# EAGLE board TransientsNanaPanel (EAGLE 9.6.2)
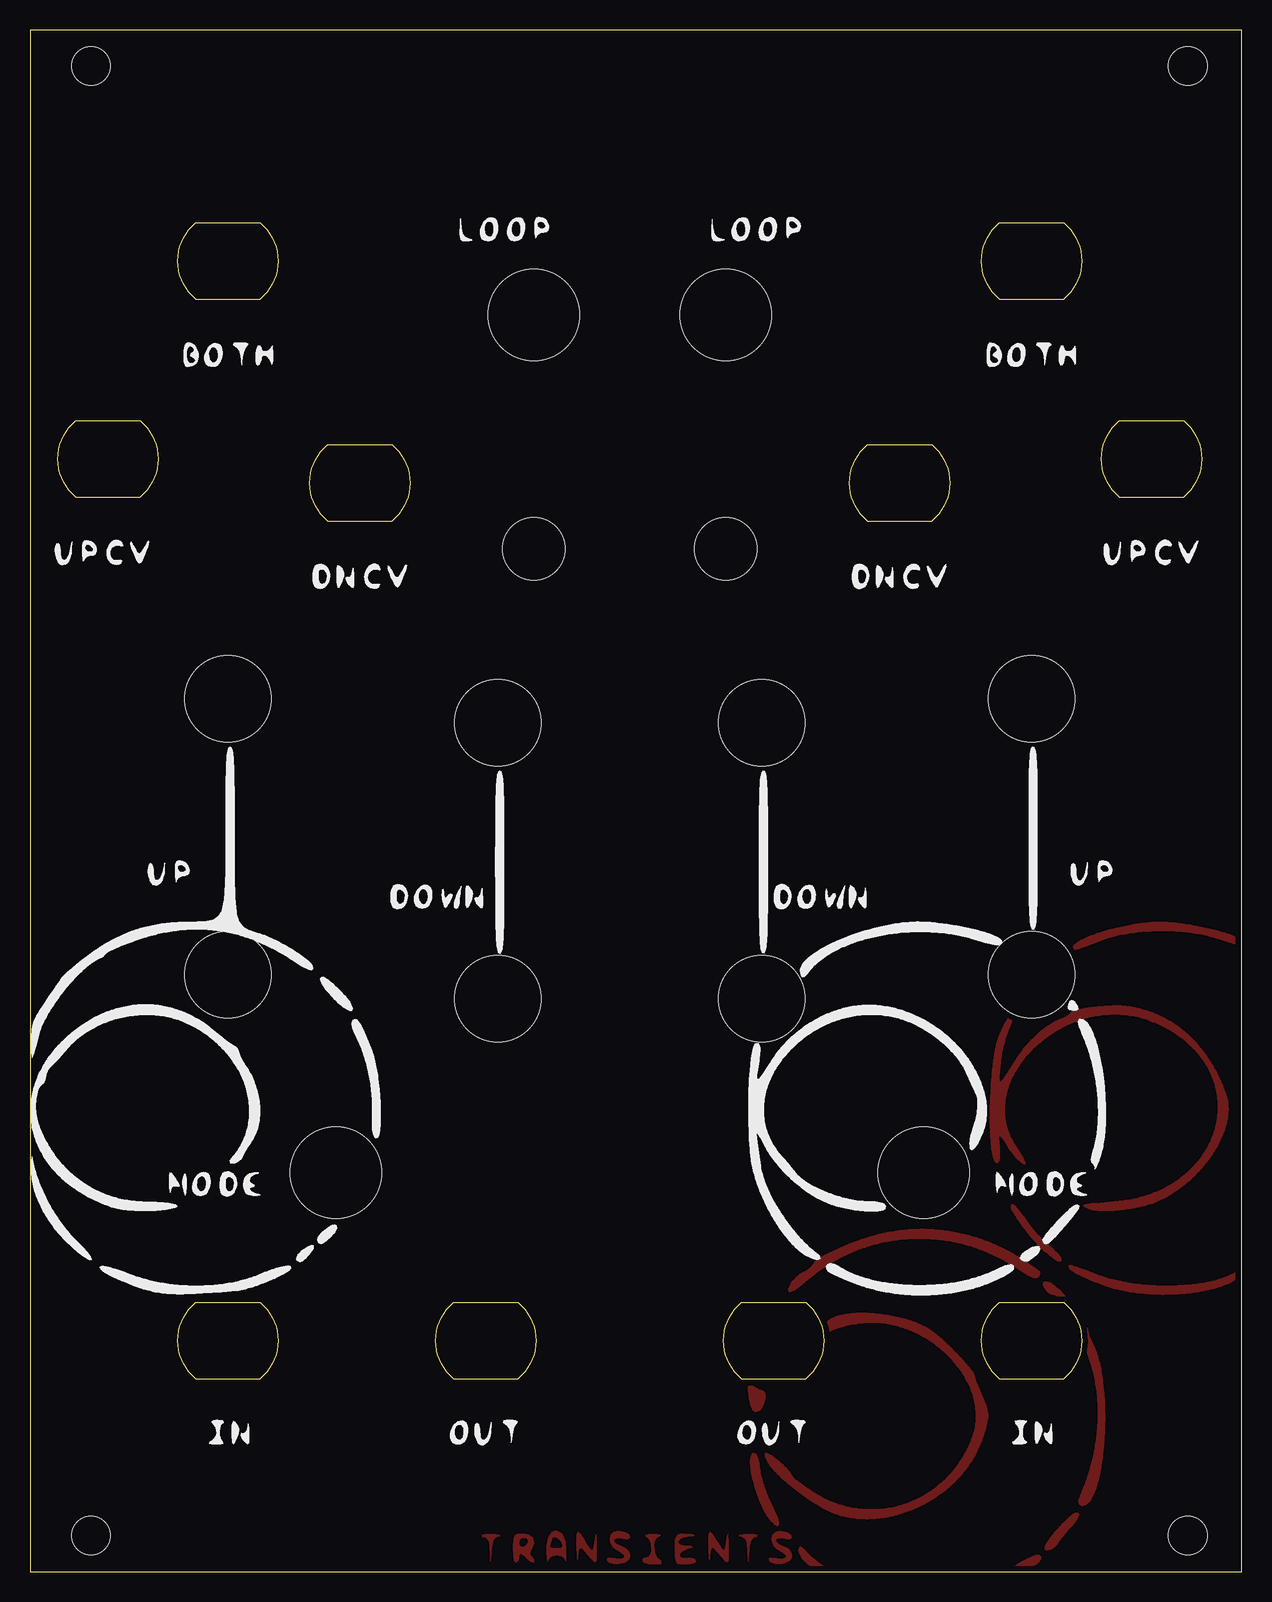
[diagram p0: board, top side]

Size 101 x 128.5 mm. Coordinates in mm from the lower left corner, seen from the top.
Outline: 0,0 101,0 101,128.5 0,128.5 0,0
Copper layers (1*16): Top 0.035mm / dielectric 1.6mm / Bottom 0.035mm
Design rules "Elecrow_2-layer_PCB_eagle_rule": minimum track width 6mil, minimum drill 12mil, track to track 6mil, track to pad 6mil, pad to pad 6mil, via to via 8mil, smd to smd 0mil, copper to edge 20mil, drill to drill 10mil, minimum pad ring 6mil, minimum via ring 6mil, stop-mask expansion 0mil, vias tented up to drill 100mil, thermal gap 10mil
Holes 3.2 mm at 5.08,3 5.08,125.5 96.52,3 96.52,125.5
Holes 5.2 mm at 42,85.25 58,85.25
Holes 7.6 mm at 42,104.75 58,104.75 25.5,33.25 74.5,33.25

## Footprints (pad centres in the part's own frame; a part is rotated, then mirrored left to right if it is on the bottom)
ALPHA9MM_POT_CUTOUT = hole 7.2: 0,0

## Placement (x,y rotation side)
E$1  [CINCH_BANANA_CUTOUT]  16.5,109.25 90 top
E$2  [CINCH_BANANA_CUTOUT]  6.5,92.75 90 top
E$3  [CINCH_BANANA_CUTOUT]  27.5,90.75 90 top
E$4  [CINCH_BANANA_CUTOUT]  83.5,109.25 90 top
E$5  [CINCH_BANANA_CUTOUT]  72.5,90.75 90 top
E$6  [CINCH_BANANA_CUTOUT]  93.5,92.75 90 top
E$7  [CINCH_BANANA_CUTOUT]  16.5,19.25 90 top
E$8  [CINCH_BANANA_CUTOUT]  38,19.25 90 top
E$9  [CINCH_BANANA_CUTOUT]  62,19.25 90 top
E$10  [CINCH_BANANA_CUTOUT]  83.5,19.25 90 top
E$11  [ALPHA9MM_POT_CUTOUT]  16.5,72.75 0 top
E$12  [ALPHA9MM_POT_CUTOUT]  39,70.75 0 top
E$13  [ALPHA9MM_POT_CUTOUT]  61,70.75 0 top
E$14  [ALPHA9MM_POT_CUTOUT]  83.5,72.75 0 top
E$15  [ALPHA9MM_POT_CUTOUT]  16.5,49.75 0 top
E$16  [ALPHA9MM_POT_CUTOUT]  39,47.75 0 top
E$17  [ALPHA9MM_POT_CUTOUT]  61,47.75 0 top
E$18  [ALPHA9MM_POT_CUTOUT]  83.5,49.75 0 top

## Library data of the parts
E$1-E$18 = ElectricNoodleBox

## Tracks (layer width: path | path; a pad name or v marks a point on that pad's centre or on a via)
S$1
  pour Top: 38.34,1.67 38.36,1.07 38.37,0.87 38.41,0.92 38.43,1.12 38.48,1.71 38.49,1.91 38.52,2.11 38.55,2.31 38.6,2.5 38.68,2.69 38.81,2.83 38.99,2.92 39.18,2.97 39.09,3.03 38.89,3.05 38.69,3.05 38.49,3.06 38.29,3.06 38.09,3.05 37.89,3.04 37.7,3.02 37.7,2.95 37.9,2.91 38.07,2.81 38.19,2.66 38.26,2.47 38.29,2.27 38.31,2.07 38.33,1.87 38.34,1.67
S$2
  pour Top: 40.29,1.74 40.29,1.54 40.31,1.34 40.33,1.14 40.36,0.95 40.44,0.77 40.61,0.82 40.72,0.99 40.78,1.18 40.79,1.38 40.89,1.52 41.06,1.43 41.22,1.3 41.52,1.04 41.67,0.91 41.84,0.8 42.03,0.78 42.01,0.97 41.91,1.15 41.76,1.28 41.69,1.46 41.73,1.65 41.82,1.83 41.91,2 41.98,2.19 42.02,2.39 42,2.59 41.92,2.77 41.78,2.91 41.61,3.02 41.42,3.08 41.24,3.11 41.26,2.86 41.43,2.78 41.53,2.61 41.53,2.45 41.45,2.27 41.31,2.12 41.14,2.03 40.94,2.01 40.82,2.16 40.79,2.35 40.81,2.55 40.9,2.73 41.05,2.85 41.24,2.86 41.21,3.12 41.03,3.12 40.83,3.12 40.63,3.1 40.44,3.03 40.35,2.86 40.31,2.66 40.3,2.46 40.29,2.26 40.29,2.06
S$3
  pour Top: 43.07,1.66 43.07,1.46 43.08,1.26 43.1,1.06 43.15,0.87 43.24,1.03 43.36,1.19 43.53,1.3 43.72,1.36 43.92,1.38 44.11,1.36 44.3,1.29 44.47,1.18 44.59,1.02 44.67,0.88 44.7,1.08 44.71,1.28 44.71,1.48 44.7,1.68 44.69,1.88 44.68,2.08 44.66,2.28 44.63,2.48 44.58,2.67 44.52,2.86 44.42,3.04 44.28,3.18 44.11,3.28 43.92,3.34 43.72,3.33 43.54,3.25 43.39,3.12 43.28,2.95 43.21,2.77 43.15,2.58 43.11,2.38 43.08,2.19 43.35,2.17 43.41,2.34 43.48,2.53 43.53,2.73 43.6,2.9 43.8,2.9 43.98,2.82 44.14,2.7 44.27,2.55 44.39,2.18 44.35,1.99 44.18,1.9 43.98,1.88 43.78,1.88 43.58,1.9 43.4,1.97 43.35,2.14 43.08,2.17 43.07,1.98 43.06,1.78
S$4
  pour Top: 45.58,1.84 45.59,1.44 45.61,1.24 45.63,1.04 45.69,1.19 45.75,1.59 45.78,1.79 45.83,1.98 46,1.98 46.14,1.85 46.28,1.7 46.79,1.08 46.93,0.93 47.08,0.8 47.22,0.88 47.24,1.08 47.25,1.28 47.25,1.48 47.24,2.08 47.22,2.68 47.21,2.88 47.19,3.08 47.13,2.93 47.1,2.74 47,2.14 46.96,1.95 46.89,1.76 46.73,1.83 46.61,1.99 46.5,2.16 46.18,2.67 46.07,2.84 45.96,3 45.84,3.16 45.69,3.29 45.59,3.14 45.57,2.94 45.56,2.74 45.56,2.54 45.56,2.34 45.57,1.94
S$5
  pour Top: 48.22,0.82 48.4,0.74 48.6,0.69 48.8,0.67 49,0.67 49.2,0.69 49.39,0.73 49.58,0.79 49.76,0.88 49.91,1.01 50.01,1.19 50.03,1.38 49.97,1.57 49.86,1.74 49.71,1.87 49.54,1.98 49.36,2.06 49.17,2.13 48.99,2.22 48.83,2.33 48.7,2.48 48.68,2.67 48.84,2.79 49.03,2.82 49.23,2.81 49.43,2.77 49.63,2.73 49.83,2.73 50,2.82 49.98,3 49.83,3.13 49.65,3.22 49.46,3.28 49.26,3.33 49.06,3.34 48.87,3.32 48.68,3.25 48.52,3.14 48.4,2.98 48.34,2.79 48.34,2.59 48.4,2.39 48.49,2.22 48.62,2.06 48.76,1.93 48.93,1.81 49.1,1.72 49.27,1.61 49.44,1.49 49.56,1.34 49.57,1.16 49.4,1.06 49.2,1.03 49,1.03 48.8,1.05 48.41,1.11 48.21,1.12 48.1,0.99
S$6
  pour Top: 51.09,0.79 51.27,0.71 51.47,0.67 51.67,0.65 51.87,0.64 52.07,0.64 52.27,0.64 52.47,0.65 52.66,0.69 52.62,0.85 52.47,0.98 52.33,1.12 52.22,1.29 52.14,1.47 52.08,1.66 52.04,1.86 52.03,2.06 52.03,2.26 52.06,2.45 52.12,2.65 52.23,2.81 52.39,2.93 52.55,3.01 52.35,3.05 52.15,3.06 51.95,3.07 51.75,3.07 51.55,3.06 51.36,3.04 51.32,2.96 51.5,2.87 51.62,2.71 51.7,2.53 51.76,2.34 51.79,2.14 51.8,1.94 51.79,1.74 51.76,1.54 51.7,1.35 51.58,1.19 51.4,1.13 51.2,1.09 51.05,0.96
S$7
  pour Top: 53.78,1.85 53.78,1.45 53.78,1.25 53.8,1.06 53.85,0.86 53.97,0.71 54.16,0.65 54.36,0.63 54.56,0.63 54.76,0.63 54.96,0.65 55.15,0.68 55.35,0.74 55.51,0.85 55.45,1.01 55.26,1.08 55.06,1.1 54.86,1.09 54.66,1.07 54.46,1.09 54.28,1.16 54.15,1.32 54.17,1.51 54.3,1.67 54.46,1.78 54.64,1.86 54.84,1.92 55.03,1.97 55.22,2.04 55.07,2.09 54.67,2.1 54.47,2.13 54.28,2.18 54.11,2.28 54.02,2.45 54.09,2.64 54.25,2.76 54.43,2.85 54.62,2.91 54.82,2.94 55.21,2.99 55.41,3.03 55.24,3.06 54.64,3.09 54.44,3.09 54.24,3.09 54.04,3.06 53.88,2.95 53.81,2.77 53.79,2.57 53.78,2.37 53.78,1.97
S$8
  pour Top: 56.57,1.81 56.58,1.61 56.58,1.41 56.6,1.21 56.64,1.03 56.69,1.22 56.74,1.62 56.77,1.81 56.84,2 57.01,1.97 57.15,1.83 57.29,1.68 57.67,1.22 57.8,1.06 57.93,0.92 58.09,0.79 58.21,0.91 58.23,1.11 58.24,1.31 58.24,1.51 58.22,2.31 58.21,2.71 58.2,2.91 58.17,3.1 58.12,2.91 58.08,2.71 58.02,2.31 57.99,2.12 57.95,1.92 57.86,1.75 57.7,1.85 57.58,2.02 57.48,2.18 57.16,2.69 57.05,2.86 56.94,3.03 56.81,3.18 56.65,3.29 56.57,3.12 56.56,2.92 56.55,2.72 56.55,2.52 56.56,2.12
S$9
  pour Top: 59.82,1.54 59.84,1.14 59.85,0.94 59.88,0.85 59.9,1.05 59.97,1.85 59.99,2.04 60.02,2.24 60.06,2.44 60.13,2.63 60.24,2.79 60.41,2.9 60.6,2.95 60.64,3.02 60.44,3.04 60.24,3.05 60.04,3.06 59.84,3.06 59.64,3.05 59.44,3.05 59.24,3.03 59.12,2.97 59.31,2.93 59.5,2.85 59.64,2.72 59.72,2.53 59.76,2.34 59.79,2.14 59.8,1.94 59.81,1.74
S$10
  pour Top: 61.74,0.81 61.92,0.73 62.12,0.69 62.32,0.67 62.51,0.67 62.71,0.69 62.91,0.73 63.1,0.8 63.27,0.9 63.42,1.04 63.5,1.21 63.51,1.41 63.45,1.6 63.33,1.76 63.17,1.89 63,1.99 62.82,2.07 62.63,2.14 62.45,2.23 62.29,2.35 62.17,2.51 62.18,2.7 62.35,2.8 62.55,2.82 62.75,2.8 62.95,2.76 63.14,2.73 63.34,2.74 63.5,2.84 63.45,3.02 63.29,3.14 63.11,3.23 62.92,3.29 62.72,3.33 62.52,3.34 62.33,3.31 62.14,3.24 61.98,3.12 61.87,2.95 61.82,2.76 61.84,2.56 61.9,2.37 62,2.19 62.13,2.04 62.28,1.91 62.44,1.8 62.62,1.7 62.79,1.6 62.94,1.47 63.07,1.32 63.04,1.13 62.86,1.05 62.66,1.02 62.46,1.03 62.26,1.05 62.06,1.08 61.86,1.11 61.67,1.11 61.6,0.96
S$14
  pour Top: 64.76,0.71 64.92,0.59 65.08,0.48 65.26,0.38 65.44,0.29 65.62,0.22 65.82,0.17 66.01,0.14 66.21,0.14 66.41,0.15 66.4,0.28 66.24,0.4 65.9,0.62 65.74,0.73 65.58,0.86 65.43,0.98 65.27,1.11 65.12,1.24 64.97,1.37 64.83,1.51 64.55,1.8 64.41,1.94 64.24,2.05 64.1,1.95 64.06,1.76 64.1,1.56 64.18,1.38 64.29,1.21 64.41,1.05 64.54,0.9 64.69,0.77
S$15
  pour Top: 82.15,0.12 82.35,0.11 82.54,0.13 82.74,0.17 82.94,0.22 83.13,0.27 83.32,0.34 83.5,0.42 83.68,0.51 83.85,0.61 84.01,0.73 84.16,0.86 84.29,1.01 84.29,1.21 84.16,1.34 83.96,1.34 83.76,1.3 83.57,1.23 83.39,1.16 83.2,1.08 83.02,1 82.84,0.91 82.67,0.81 82.5,0.71 82.33,0.59 82.17,0.47 82.04,0.32
S$16
  pour Top: 84.67,1.83 84.87,1.8 85.06,1.85 85.23,1.95 85.39,2.07 85.54,2.21 85.67,2.36 85.79,2.52 85.9,2.68 86.02,2.84 86.15,3 86.27,3.15 86.53,3.46 86.92,3.91 87.05,4.07 87.18,4.22 87.3,4.38 87.41,4.55 87.47,4.74 87.34,4.86 87.15,4.86 86.97,4.76 86.81,4.64 86.66,4.52 86.51,4.38 86.36,4.25 86.22,4.11 86.08,3.96 85.94,3.82 85.8,3.67 85.67,3.52 85.54,3.37 85.41,3.22 85.28,3.07 85.16,2.91 85.04,2.75 84.92,2.59 84.8,2.42 84.7,2.25 84.61,2.08 84.59,1.88
S$17
  pour Top: 61.78,4.23 61.92,4.08 62.07,3.95 62.24,3.85 62.42,3.87 62.44,4.07 62.4,4.27 62.34,4.46 62.27,4.65 62.2,4.83 62.12,5.02 62.04,5.2 61.95,5.38 61.77,5.74 61.69,5.92 61.61,6.1 61.53,6.28 61.45,6.47 61.38,6.66 61.31,6.84 61.24,7.03 61.18,7.22 61.12,7.41 61.06,7.6 61.01,7.8 60.96,7.99 60.91,8.18 60.88,8.38 60.82,8.78 60.79,8.98 60.76,9.17 60.71,9.37 60.65,9.56 60.55,9.73 60.4,9.85 60.21,9.82 60.1,9.66 60.05,9.47 60.03,9.27 60.03,9.07 60.05,8.87 60.07,8.67 60.09,8.47 60.12,8.27 60.16,8.08 60.2,7.88 60.25,7.69 60.29,7.49 60.34,7.3 60.4,7.1 60.45,6.91 60.51,6.72 60.58,6.53 60.64,6.34 60.71,6.16 60.78,5.97 60.86,5.78 60.94,5.6 61.02,5.42 61.11,5.24 61.2,5.06 61.3,4.89 61.4,4.71 61.51,4.55 61.63,4.39
S$18
  pour Top: 404 corners
S$19
  pour Top: 87.66,5.53 87.86,5.53 88.04,5.59 88.2,5.71 88.34,5.86 88.46,6.02 88.56,6.19 88.65,6.37 88.73,6.55 88.81,6.74 88.88,6.92 88.94,7.11 89,7.31 89.05,7.5 89.1,7.69 89.14,7.89 89.19,8.08 89.23,8.28 89.26,8.47 89.3,8.67 89.33,8.87 89.36,9.07 89.42,9.46 89.44,9.66 89.49,10.06 89.52,10.46 89.56,10.86 89.58,11.25 89.59,11.45 89.61,11.85 89.62,12.25 89.63,12.65 89.62,13.05 89.62,13.45 89.61,13.65 89.6,14.05 89.59,14.25 89.56,14.65 89.55,14.85 89.53,15.05 89.49,15.45 89.45,15.85 89.42,16.04 89.39,16.24 89.36,16.44 89.33,16.64 89.29,16.83 89.26,17.03 89.21,17.23 89.17,17.42 89.12,17.62 89.07,17.81 89.01,18 88.95,18.19 88.89,18.38 88.82,18.57 88.74,18.75 88.66,18.93 88.57,19.11 88.48,19.29 88.4,19.48 88.33,19.66 88.28,19.86 88.25,20.05 88.18,20.24 88.01,20.34 87.84,20.27 87.77,20.08 87.76,19.88 87.78,19.68 87.81,19.48 87.85,19.29 87.89,19.09 87.94,18.9 87.99,18.71 88.1,18.32 88.22,17.94 88.41,17.37 88.47,17.18 88.53,16.99 88.58,16.79 88.63,16.6 88.68,16.41 88.72,16.21 88.76,16.02 88.8,15.82 88.83,15.62 88.86,15.42 88.89,15.23 88.92,15.03 88.94,14.83 88.96,14.63 88.98,14.43 88.99,14.23 89,14.03 89.01,13.83 89.02,13.63 89.02,13.43 89.03,13.23 89.02,13.03 89.02,12.83 89.01,12.63 89.01,12.43 88.99,12.23 88.98,12.03 88.97,11.83 88.95,11.64 88.93,11.44 88.9,11.24 88.88,11.04 88.85,10.84 88.82,10.64 88.79,10.45 88.75,10.25 88.72,10.05 88.68,9.86 88.64,9.66 88.59,9.47 88.55,9.27 88.5,9.08 88.45,8.88 88.4,8.69 88.34,8.5 88.28,8.31 88.22,8.12 88.16,7.93 88.1,7.74 88.03,7.55 87.96,7.36 87.89,7.17 87.82,6.99 87.75,6.8 87.59,6.43 87.52,6.25 87.45,6.06 87.41,5.86 87.43,5.66
S$20
  pour Top: 59.95,14.4 59.98,14.2 60.01,14.01 60.06,13.81 60.13,13.63 60.24,13.46 60.42,13.37 60.62,13.36 60.8,13.44 60.95,13.57 61.06,13.74 61.16,13.91 61.23,14.1 61.28,14.29 61.31,14.49 61.31,14.69 61.26,14.88 61.13,15.03 60.94,15.09 60.75,15.17 60.57,15.25 60.4,15.36 60.24,15.48 60.07,15.58 59.91,15.5 59.87,15.31 59.87,15.11 59.89,14.91 59.91,14.71 59.93,14.51
S$21
  pour Top: 86.29,22.41 86.43,22.27 86.57,22.13 86.72,21.99 86.88,21.88 86.91,22 86.82,22.18 86.71,22.35 86.61,22.52 86.49,22.69 86.37,22.84 86.25,23 86.11,23.15 85.98,23.3 85.84,23.44 85.69,23.57 85.54,23.7 85.38,23.83 85.22,23.94 85.04,24.04 84.86,24.12 84.67,24.16 84.48,24.1 84.45,23.91 84.52,23.72 84.63,23.55 84.77,23.4 84.92,23.27 85.08,23.16 85.27,23.1 85.47,23.06 85.64,22.97 85.81,22.86 85.96,22.73 86.11,22.6
S$22
  pour Top: 89.6,23.85 89.79,23.78 89.98,23.72 90.17,23.66 90.37,23.61 90.56,23.56 90.76,23.51 90.95,23.47 91.15,23.43 91.34,23.39 91.54,23.36 91.74,23.33 91.94,23.3 92.13,23.27 92.33,23.25 92.53,23.23 92.93,23.19 93.33,23.16 93.53,23.15 93.93,23.13 94.33,23.12 94.53,23.12 94.93,23.13 95.33,23.14 95.73,23.16 96.13,23.19 96.32,23.21 96.52,23.22 96.72,23.25 96.92,23.27 97.12,23.3 97.32,23.33 97.51,23.36 97.71,23.39 97.91,23.43 98.1,23.47 98.3,23.51 98.49,23.56 98.69,23.61 98.88,23.66 99.07,23.72 99.26,23.78 99.45,23.85 99.64,23.92 99.82,24 100,24.08 100.18,24.17 100.35,24.27 100.52,24.38 100.68,24.5 100.83,24.63 100.95,24.79 100.89,24.94 100.69,24.94 100.5,24.89 100.31,24.82 100.13,24.74 99.95,24.65 99.77,24.57 99.58,24.5 99.39,24.43 99.2,24.36 99.01,24.3 98.82,24.25 98.63,24.2 98.43,24.15 98.24,24.11 98.04,24.07 97.84,24.03 97.65,24 97.45,23.97 97.25,23.94 97.05,23.91 96.85,23.89 96.66,23.87 96.46,23.85 96.26,23.84 96.06,23.82 95.66,23.8 95.26,23.79 94.86,23.78 94.66,23.78 94.26,23.79 93.86,23.8 93.46,23.83 93.06,23.86 92.66,23.89 92.27,23.94 91.87,23.99 91.47,24.06 91.28,24.09 91.08,24.13 90.88,24.17 90.69,24.21 90.49,24.26 90.3,24.31 90.11,24.36 89.91,24.41 89.72,24.47 89.53,24.53 89.34,24.59 89.15,24.66 88.41,24.95 88.03,25.09 87.84,25.15 87.47,25.29 87.28,25.35 87.09,25.41 86.89,25.46 86.7,25.51 86.56,25.43 86.66,25.26 86.81,25.13 86.98,25.02 87.15,24.91 87.33,24.82 87.51,24.73 87.68,24.64 87.87,24.55 88.23,24.39 88.42,24.31 88.79,24.16 88.97,24.09 89.34,23.94
S$23
  pour Top: 226 corners
S$24
  pour Top: 84.68,26.63 84.84,26.5 84.99,26.38 85.15,26.26 85.31,26.14 85.48,26.02 85.64,25.91 85.83,25.83 86,25.91 85.97,26.1 85.86,26.27 85.73,26.42 85.59,26.56 85.44,26.7 85.29,26.83 85.14,26.96 84.99,27.09 84.83,27.22 84.69,27.35 84.54,27.49 84.4,27.64 84.27,27.78 84.13,27.93 84,28.08 83.87,28.23 83.74,28.38 83.61,28.54 83.49,28.69 83.36,28.85 83.25,29.01 82.9,29.5 82.78,29.66 82.66,29.82 82.54,29.98 82.41,30.13 82.27,30.28 82.13,30.42 81.98,30.55 81.79,30.57 81.76,30.38 81.83,30.2 81.92,30.02 82.02,29.85 82.13,29.68 82.24,29.51 82.35,29.35 82.47,29.18 82.7,28.86 82.94,28.54 83.07,28.38 83.32,28.07 83.57,27.77 83.84,27.46 83.97,27.32 84.11,27.17 84.25,27.02 84.39,26.88 84.54,26.75
S$25
  pour Top: 524 corners
S$26
  pour Top: 86.97,52.12 86.86,51.96 86.88,51.81 87.08,51.83 87.27,51.88 87.47,51.94 87.65,52.01 88.03,52.14 88.59,52.36 89.15,52.58 89.33,52.65 89.52,52.72 89.71,52.78 89.9,52.84 90.1,52.9 90.29,52.95 90.48,53 90.68,53.04 90.87,53.09 91.07,53.13 91.27,53.16 91.46,53.2 91.66,53.23 91.86,53.26 92.06,53.29 92.25,53.31 92.45,53.34 92.65,53.36 93.05,53.39 93.25,53.4 93.45,53.41 93.85,53.43 94.25,53.44 94.45,53.44 94.85,53.43 95.25,53.42 95.45,53.41 95.65,53.39 95.85,53.38 96.05,53.36 96.25,53.34 96.44,53.32 96.64,53.3 96.84,53.27 97.04,53.24 97.24,53.21 97.43,53.17 97.63,53.13 97.82,53.09 98.02,53.05 98.21,53 98.41,52.95 98.6,52.9 98.79,52.84 99.55,52.6 99.94,52.48 100.13,52.42 100.32,52.37 100.52,52.33 100.72,52.3 100.91,52.32 100.98,52.5 100.88,52.66 100.71,52.78 100.54,52.87 100.35,52.95 100.17,53.02 99.98,53.09 99.79,53.16 99.6,53.22 99.41,53.28 99.22,53.33 99.02,53.38 98.64,53.48 98.44,53.53 98.25,53.58 97.86,53.66 97.66,53.7 97.27,53.78 96.87,53.85 96.68,53.88 96.28,53.95 96.08,53.97 95.69,54.02 95.49,54.05 95.29,54.07 95.09,54.08 94.89,54.1 94.69,54.11 94.49,54.12 94.29,54.12 94.09,54.12 93.89,54.12 93.69,54.11 93.49,54.1 93.29,54.08 93.09,54.06 92.89,54.04 92.7,54.02 92.5,53.99 92.3,53.96 92.1,53.93 91.91,53.9 91.51,53.83 91.32,53.79 90.92,53.7 90.54,53.61 90.15,53.51 89.95,53.46 89.57,53.35 89.38,53.29 89.19,53.23 89,53.17 88.81,53.1 88.62,53.03 88.43,52.96 88.25,52.89 88.07,52.81 87.88,52.73 87.7,52.64 87.53,52.54 87.36,52.44 87.19,52.33 87.04,52.2